# Altium PCB afeBoaard.PcbDoc
Units mm, origin at the board's own origin, x right, y up, seen from the top; angles counter-clockwise.
Board outline 85.22 x 87.63 mm, 2 copper layers (Top Layer, Bottom Layer), stack 1.17 mm thick; 34 components, 35 nets, 138 pads, 184 vias.
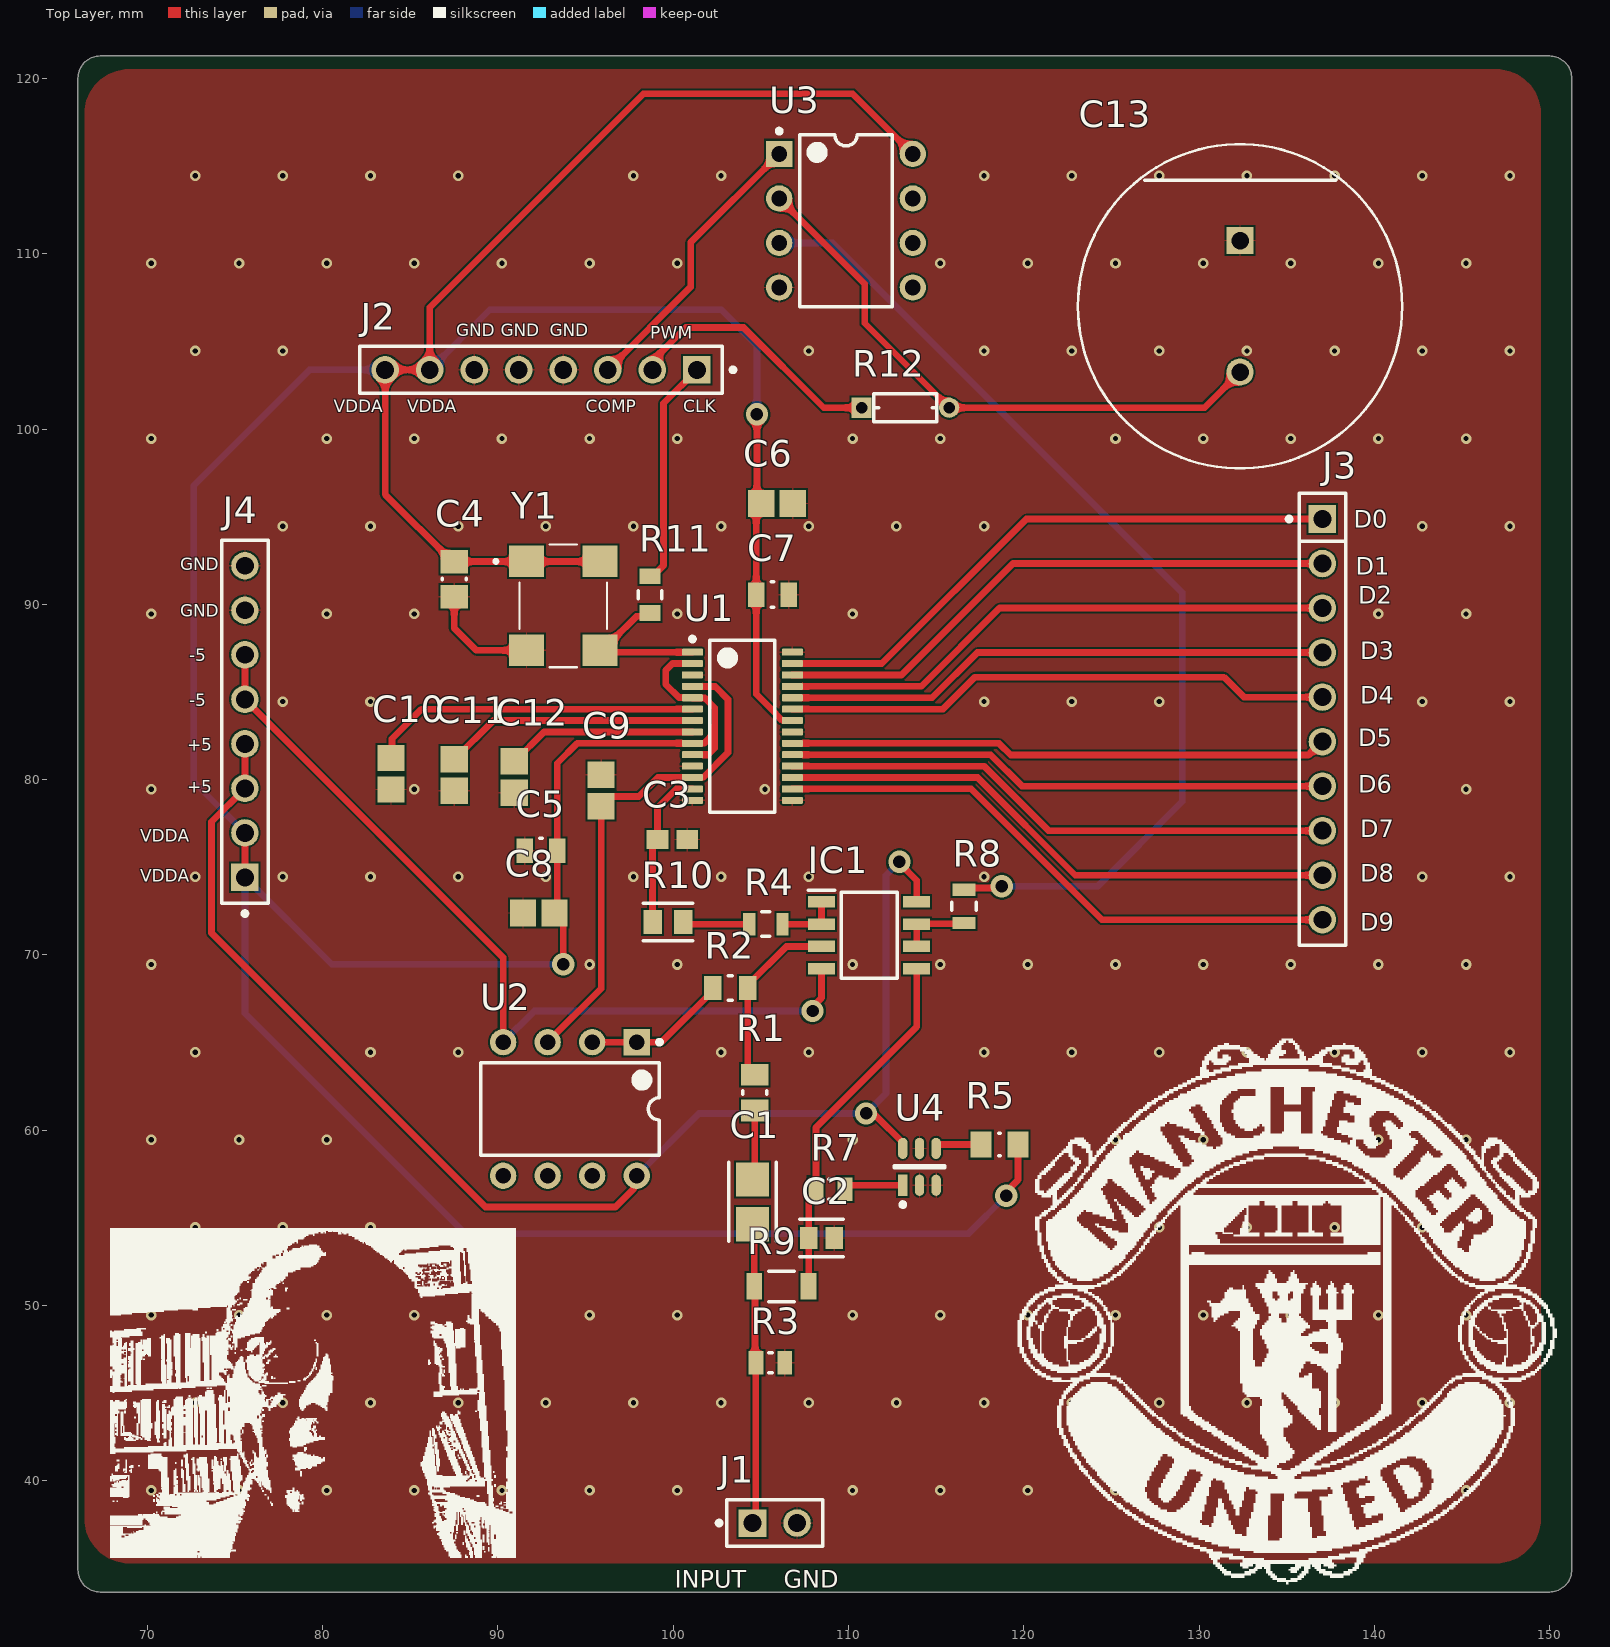
[diagram p0: Top Layer view]
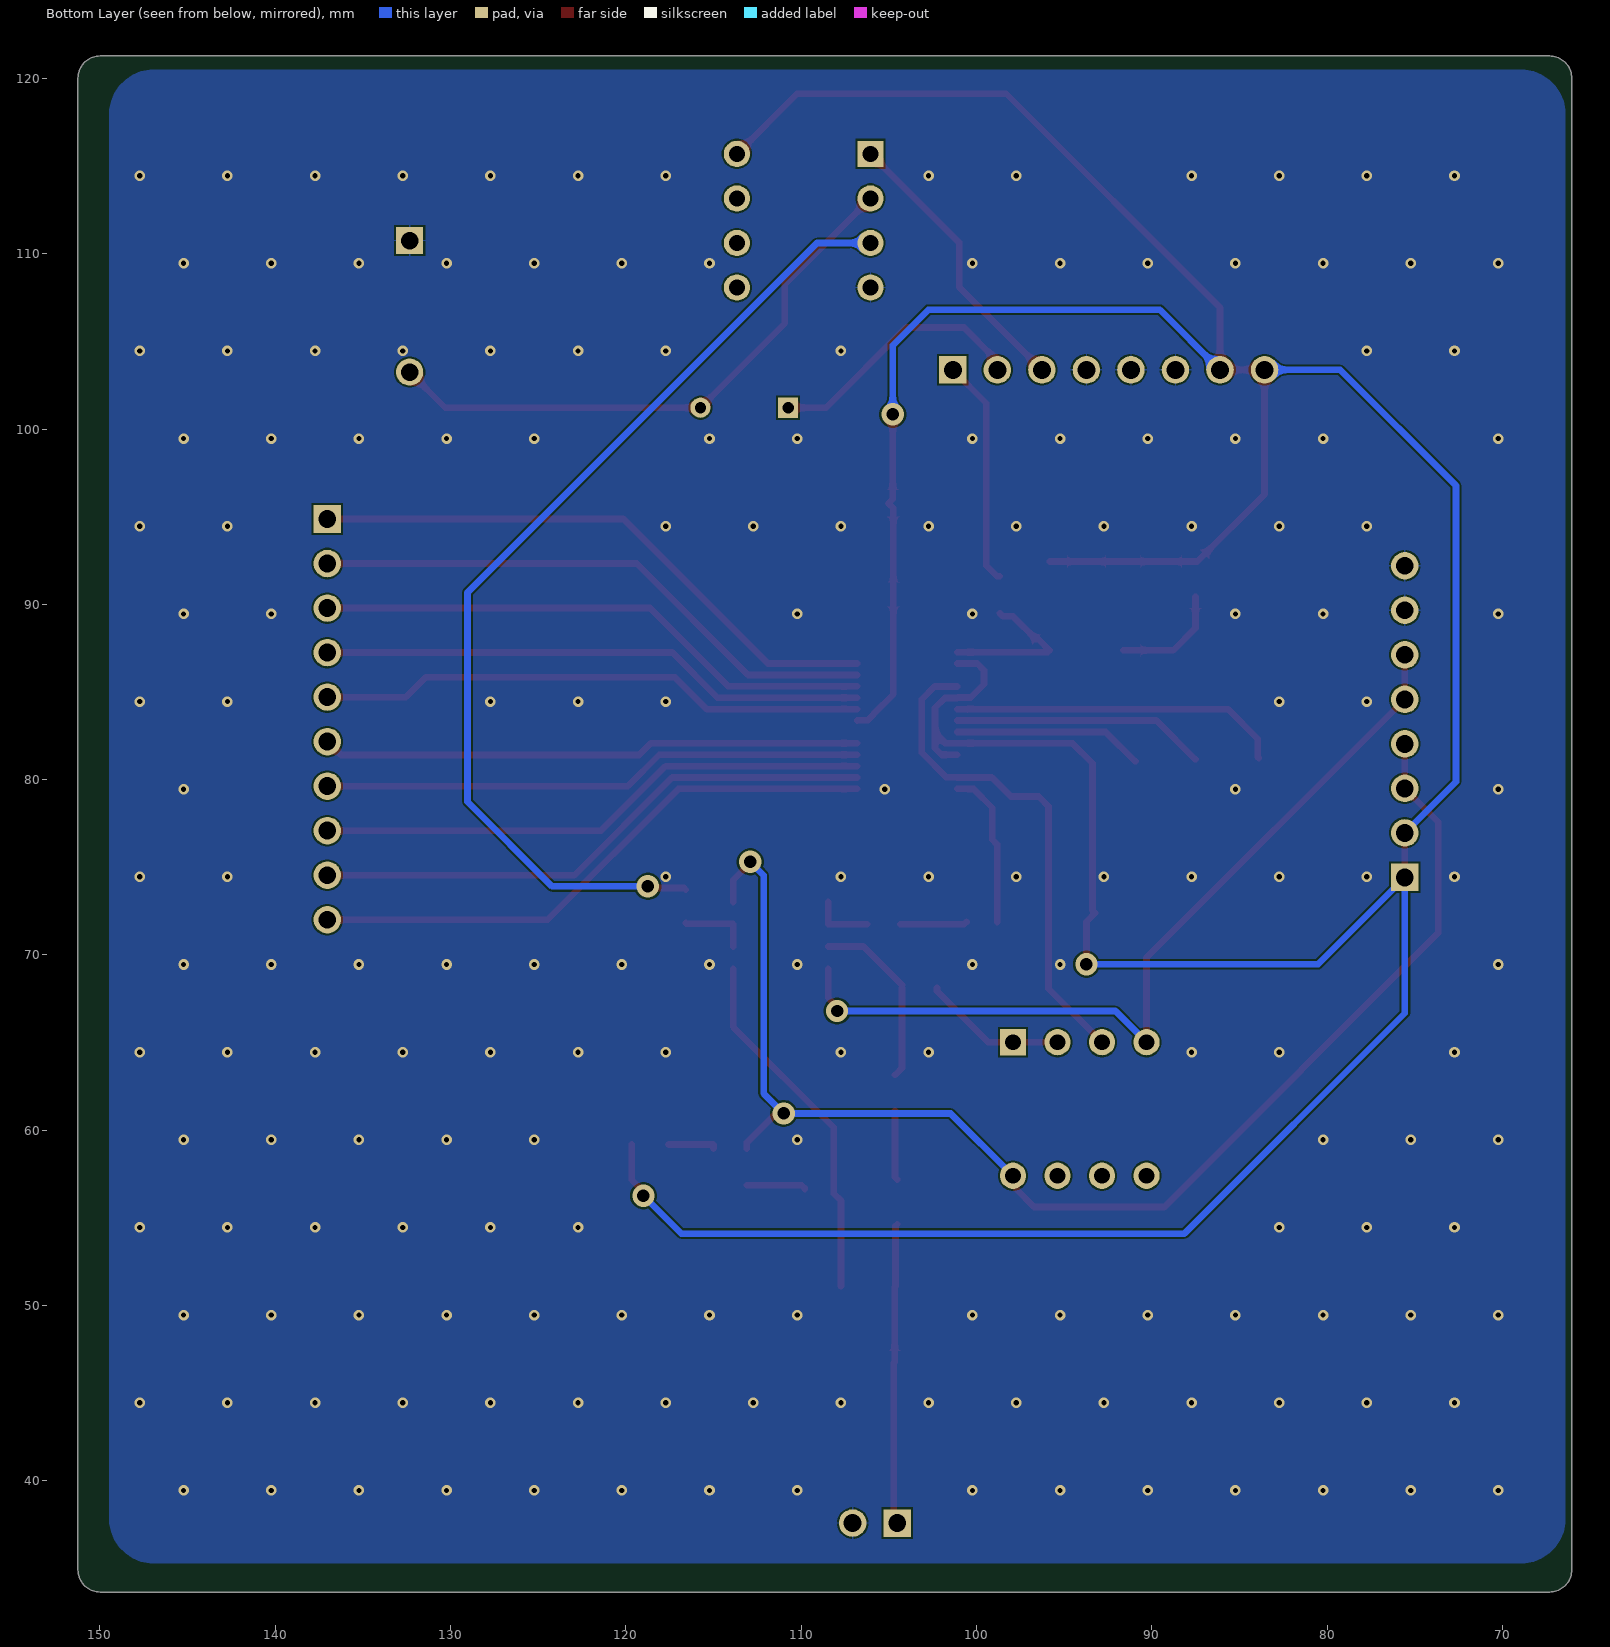
[diagram p1: Bottom Layer view, seen from below]
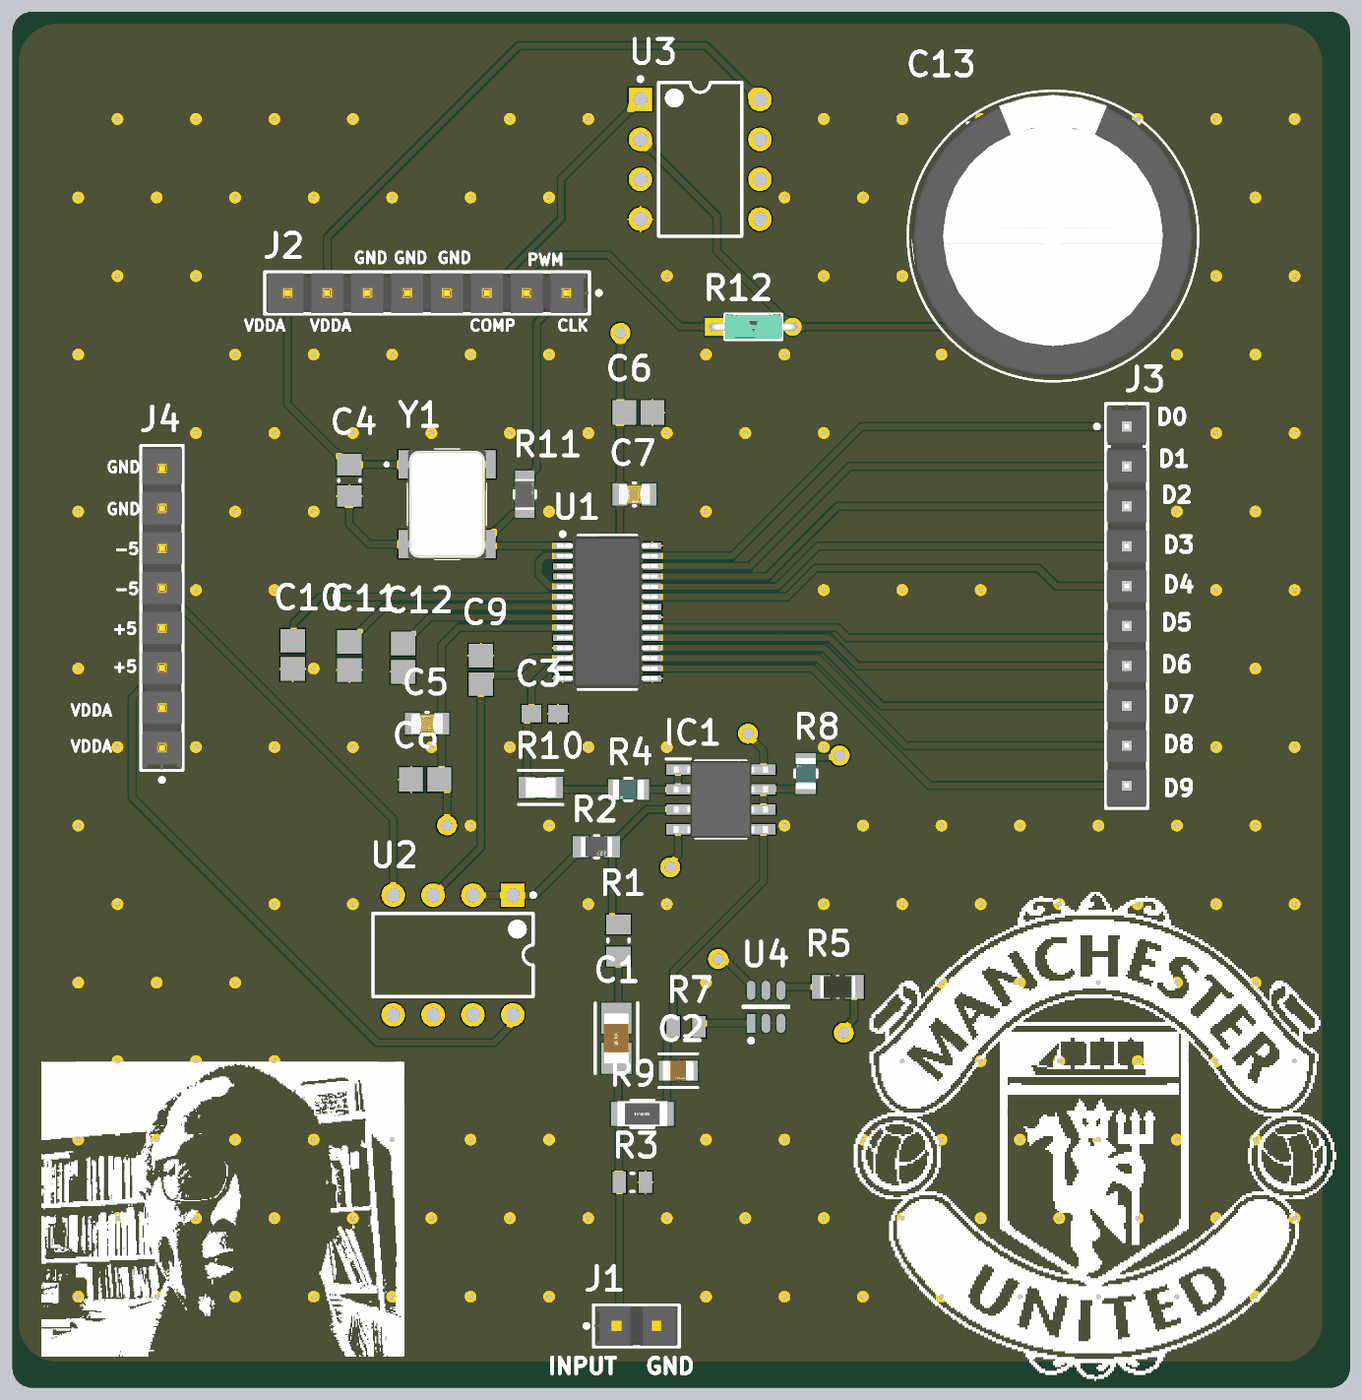
[diagram p2: 3D render of the assembled board from above, using the file's embedded part models]

## Layer stack, top to bottom
Top Solder: solder mask 0.0127, Solder Resist, Dk 3.8
Top Layer: signal copper 0.035
Dielectric: core 1.1, FR-4, Dk 4.5
Bottom Layer: signal copper 0.035
Bottom Solder: solder mask 0.0127, Solder Resist, Dk 3.8

## Board outline
66.04,34.925 66.04,120.015 cw(c67.31,120.015) 67.31,121.285 149.987,121.285 cw(c149.987,120.015) 151.257,120.015 151.257,34.925 cw(c149.987,34.925) 149.987,33.655 67.31,33.655 cw(c67.31,34.925)

## Design rules (kind name [scope] priority, off if disabled: settings)
BoardOutlineClearance [All] p1: gap=0.2 ignorepadtopadclearanceinfootprint=FALSE
Clearance [All] p1: gap=0.102 ignorepadtopadclearanceinfootprint=FALSE except(0.127: Arc-Via Track-Via SMDPad-Via THPad-Via Via-Via Via-Fill Via-Poly Via-Region Via-Text; 0.25: Arc-Hole Track-Hole SMDPad-Hole THPad-Hole Via-Hole Fill-Hole Poly-Hole Region-Hole Text-Hole)
ComponentClearance [All] p1: gap=0.102 collisioncheckmode=3 verticalgap=0.102 showdistances=TRUE
DiffPairsRouting [All] p1: maxlimit=0.102 minlimit=0.102 mostfreqgap=0.102 toplayer_minwidth=0.102 toplayer_maxwidth=1816.048 toplayer_prefwidth=0.102 bottomlayer_minwidth=0.102 bottomlayer_maxwidth=1816.048 bottomlayer_prefwidth=0.102 maxuncoupledlength=12.7
Height [All] p1: minheight=0 maxheight=1816.048 prefheight=12.7
HoleSize [All] p1: absolutevalues=TRUE maxlimit=6.3 minlimit=0.2 maxpercent=80.000 minpercent=20.000
HoleToHoleClearance [All] p1: gap=0.25 allowstackedmicrovias=FALSE
MinimumAnnularRing [All] p1: minimumring=0.076
MinimumSolderMaskSliver [All] p1: minsoldermaskwidth=0
PlaneClearance [All] p1: clearance=0.102
PlaneConnect PlaneConnectPowerPads [InPadClass('PowerPads')] p1: planeconnectstyle=Direct reliefexpansion=0.508 reliefentries=4 reliefconductorwidth=0.254 reliefairgap=0.254
PlaneConnect [All] p2: pad.planeconnectstyle=Relief pad.reliefexpansion=0.3 pad.reliefentries=4 pad.reliefconductorwidth=0.102 pad.reliefairgap=0.102 via.planeconnectstyle=Direct via.reliefexpansion=0.3 via.reliefentries=4 via.reliefconductorwidth=0.127 via.reliefairgap=0.127
PolygonConnect PolygonConnectPowerPads [All vs (InPadClass('PowerPads'))] p1: connectstyle=Direct reliefconductorwidth=0.254 reliefentries=4 polygonreliefangle="90 Angle" airgapwidth=0.254
PolygonConnect [All] p2: thpad.connectstyle=Relief thpad.reliefconductorwidth=0.102 thpad.reliefentries=4 thpad.polygonreliefangle="90 Angle" thpad.airgapwidth=0.102 smdpad.connectstyle=Relief smdpad.reliefconductorwidth=0.102 smdpad.reliefentries=4 smdpad.polygonreliefangle="90 Angle" smdpad.airgapwidth=0.102 via.connectstyle=Direct via.reliefconductorwidth=0.127 via.reliefentries=4 via.polygonreliefangle="90 Angle" via.airgapwidth=0.127
RoutingVias [All] p1: holewidth=0.2 width=0.45 viastyle="Through Hole" minholewidth=0.2 minwidth=0.45 maxholewidth=6.3 maxwidth=6.55
SilkToSilkClearance [All] p1: silktosilkclearance=0
SilkToSolderMaskClearance [IsPad] p1: minsilkscreentomaskgap=0.102 clearancetoexposedcopper=TRUE
SolderMaskExpansion [All] p1: expansion=0.075 istentingtop=FALSE
SupplyNets "Schematic Supply Nets_4" [InNet('VDDA')] p1: voltage=0.000
SupplyNets "Schematic Supply Nets_3" [InNet('GND')] p2: voltage=0.000
SupplyNets "Schematic Supply Nets_2" [InNet('1V')] p3: voltage=0.000
SupplyNets "Schematic Supply Nets_1" [InNet('-5')] p4: voltage=0.000
SupplyNets "Schematic Supply Nets" [InNet('+5')] p5: voltage=0.000
Width [All] p1: maxlimit=1816.048 minlimit=0.102 preferedwidth=0.102
20 further rules are at their usual default settings.

## Classes and differential pairs
net class D[9..0]: D0 D1 D2 D3 D4 D5 D6 D7 D8 D9
component class U_VoltageScaling: C1 C2 IC1 R1 R2 R3 R4 R5 R7 R8 R9 U4
component class U_DCCOMPProcess: C13 R12 U3
component class U_ADC: C3 C4 C5 C6 C7 C8 C9 C10 C11 C12 R10 R11 U1 U2 Y1
component class TopLevelProcessor400: J1 J2 J3 J4

## Components (designator, comment, footprint, x,y, rotation, side; value= is the part's Value field where it differs from the comment)
C1 "1206 33uF" FP-C3216-160-0_2-IPC_A 104.521,55.912 r90 top
C2 "0805 0.1uF" FP-0805B-IPC_C 108.458,53.848 r0 top
C3 "0603 50pF" CAPC1608X90X35ML15T15 99.949,76.581 r0 top
C4 "0805 10nF" CAPC0805(2012)100_M 87.503,91.44 r270 top value=10nF
C5 "0805 4.7uF" FP-CC0805-0_85-MFG 92.456,75.946 r180 top value="4.7 uF"
C6 "0805 100nF" CAPC2013X140X50ML20T25 105.918,95.758 r0 top
C7 "0805 4.7uF" FP-CC0805-0_85-MFG 105.664,90.551 r0 top value="4.7 uF"
C8 "0805 100nF" CAPC2013X140X50ML20T25 92.329,72.39 r180 top
C9 "0805 100nF" CAPC2013X140X50ML20T25 95.885,79.375 r90 top
C10 "0805 100nF" CAPC2013X140X50ML20T25 83.898,80.333 r270 top
C11 "0805 100nF" CAPC2013X140X50ML20T25 87.503,80.264 r270 top
C12 "0805 100nF" CAPC2013X140X50ML20T25 90.932,80.148 r270 top
C13 "EEUFK1V332S" FP-RAD-TH-D_18_0_5-L_25_2-MFG 132.334,107.001 r270 top
IC1 "LT1813CS8#PBF" SOIC127P599X175-8N 111.17,71.12 r0 top
J1 "TSW-102-07-F-S" FP-TSW-102-07-F-S-MFG 105.791,37.592 r0 top
J2 "TSW-108-08-G-S" FP-TSW-108-08-G-S-MFG 92.456,103.378 r180 top
J3 "TSW-110-07-T-S" FP-TSW-110-07-T-S-MFG 137.033,83.439 r270 top
J4 "TSW-108-08-G-S" FP-TSW-108-08-G-S-MFG 75.565,83.312 r90 top
R1 "0805 2k" RESC2013X60X30ML20T20 104.648,62.141 r90 top
R2 "0805 500 Ohm" FP-RNCF0805-MFG 103.251,68.11 r0 top
R3 "0805 1Mohm" RESC2013X50X30LL20T20 105.537,46.736 r0 top
R4 "0805 100" FP-TNPW0805-e3-MFG 105.283,71.755 r180 top
R5 "0805 10k" RESC2013X50X35ML15T15 118.618,59.182 r180 top value=10k
R7 "0805 100k" RESC2013X60X30LL20T20 108.966,56.642 r180 top
R8 "0805 100" FP-TNPW0805-e3-MFG 116.586,72.771 r90 top
R9 "1206 1.5Meg" FP-MCR18-MFG 106.172,51.092 r0 top
R10 "0805 18 Ohm" FP-CR0805-IPC_B 99.695,71.882 r180 top
R11 "0805 33 ohm" FP-AC0805-MFG 98.679,90.551 r90 top value=33Ω
R12 "MBA02040C2200FC100" FP-MBA0204-MFG 113.244,101.219 r0 top value=220Ω
U1 "ADC10065CIMT/NOPB" PW0028A_L 103.942,83.047 r0 top
U2 "TL052CPE4" TI-P8 94.107,61.214 r270 top
U3 "MCP6002-E/P" PDIP300-P8 109.855,111.887 r0 top
U4 "MCP1501T-10E/CHY" FP-C04-028-IPC_C 114.046,57.912 r90 top
Y1 "CB3LV-3I-60M000000" OSC_CB3LV-3I-60M000000 93.726,89.916 r0 top

## Footprints (in the part's own frame and the unit in brackets; to place one, negate y for a bottom-side part, rotate by r counter-clockwise, add the part's x,y. Pads: shape width x height; smd on the part's side, far side on the other; paste and mask are expansions set on the pad)
CAPC0805(2012)100_M [mm] "Chip Capacitor, Body 2.0x1.2mm, Height 1.0mm, IPC Low Density"
  rect 1.35x1.55 smd: 1(-1,0) 2(1,0)
  silkscreen extent -0.05,-0.67 0.05,0.67, body extent -1.1,-0.73 1.1,0.73, height 1
CAPC1608X90X35ML15T15 [mm] "Chip Capacitor, 2-Leads, Body 1.60x0.81mm, IPC Low Density"
  rect 1.25x1.1 smd: 1(-0.85,0) 2(0.85,0)
  body extent -0.88,-0.48 0.87,0.48, height 0.9
CAPC2013X140X50ML20T25 [mm] "Chip Capacitor, 2-Leads, Body 2.00x1.25mm, IPC Low Density"
  rect 1.5x1.55 smd: 1(-0.9,0) 2(0.9,0)
  body extent -1.1,-0.72 1.1,0.72, height 1.4
FP-0805B-IPC_C [mm]
  rect 1.006x1.262 smd paste+0 mask+0: 1(-0.726,0) 2(0.726,0)
  silkscreen extent -1.23,-1.07 1.23,1.07, body extent -1.33,-0.77 1.33,0.77, height 0.25
FP-AC0805-MFG [mm]
  rect 0.9x1.2 smd paste+0 mask+0: 1(-1.05,0) 2(1.05,0)
  silkscreen extent -0.23,-0.67 0.23,0.67, body extent -1.6,-0.77 1.6,0.77, height 0.25
FP-C04-028-IPC_C [mm]
  rect 1.205x0.538 smd paste+0 mask+0: 1(-1.05,0.95)
  rrect100% 1.205x0.538 smd paste+0 mask+0: 2(-1.05,0) 3(-1.05,-0.95) 4(1.05,-0.95) 5(1.05,0) 6(1.05,0.95)
  silkscreen extent -2.28,-1.45 0.05,1.45
FP-C3216-160-0_2-IPC_A [mm]
  rect 1.954x1.906 smd paste+0 mask+0: 1(-1.276,0) 2(1.276,0)
  silkscreen extent -2.25,-1.35 2.25,1.35, body extent -2.75,-1.45 2.75,1.45, height 0.25
FP-CC0805-0_85-MFG [mm]
  rect 0.95x1.4 smd paste+0 mask+0: 1(-0.925,0) 2(0.925,0)
  silkscreen extent -0.08,-0.72 0.08,0.72, body extent -1.6,-1.05 1.6,1.05, height 0.25
FP-CR0805-IPC_B [mm]
  rect 1.058x1.362 smd paste+0 mask+0: 1(-0.877,0) 2(0.877,0)
  silkscreen extent -1.41,-1.08 1.41,1.08, body extent -1.66,-0.93 1.66,0.93, height 0.25
FP-MBA0204-MFG [mm]
  rect 1.15x1.15 hole 0.65 paste-2539.97 mask+0: 1(-2.5,0)
  round 1.15 hole 0.65 paste-2539.97 mask+0: 2(2.5,0)
  silkscreen extent -1.8,-0.8 1.8,0.8, body extent -3.17,-0.9 3.17,0.9, height 0.25
FP-MCR18-MFG [mm]
  rect 0.9x1.5 smd paste+0 mask+0: 1(-1.55,0) 2(1.55,0)
  silkscreen extent -0.73,-0.87 0.73,0.87, body extent -2.1,-0.98 2.1,0.98, height 0.25
FP-RAD-TH-D_18_0_5-L_25_2-MFG [mm]
  rect 1.55x1.55 hole 1 paste-2539.97 mask+0: 1(-3.75,0)
  round 1.55 hole 1 paste-2539.97 mask+0: 2(3.75,0)
  silkscreen extent -9.25,-9.25 9.25,9.25, body extent -9.35,-9.35 9.35,9.35, height 0.25
FP-RNCF0805-MFG [mm]
  rect 1x1.35 smd paste+0 mask+0: 1(-1,0) 2(1,0)
  silkscreen extent -0.13,-0.7 0.13,0.7, body extent -1.6,-0.8 1.6,0.8, height 0.25
FP-TNPW0805-e3-MFG [mm]
  rect 0.7x1.3 smd paste+0 mask+0: 1(-0.95,0) 2(0.95,0)
  silkscreen extent -0.23,-0.7 0.23,0.7, body extent -1.4,-0.8 1.4,0.8, height 0.25
FP-TSW-102-07-F-S-MFG [mm]
  rect 1.57x1.57 hole 1.02 paste-2539.97 mask+0: 1(-1.27,0)
  round 1.57 hole 1.02 paste-2539.97 mask+0: 2(1.27,0)
  silkscreen extent -3.3,-1.33 2.73,1.34, body extent -2.83,-1.43 2.83,1.44, height 0.25
FP-TSW-108-08-G-S-MFG [mm]
  rect 1.57x1.57 hole 1.02 paste-2539.97 mask+0: 1(-8.89,0)
  round 1.57 hole 1.02 paste-2539.97 mask+0: 2(-6.35,0) 3(-3.81,0) 4(-1.27,0) 5(1.27,0) 6(3.81,0) 7(6.35,0) 8(8.89,0)
  silkscreen extent -11.08,-1.34 10.35,1.34, body extent -10.45,-1.44 10.45,1.44, height 0.25
FP-TSW-110-07-T-S-MFG [mm]
  rect 1.57x1.57 hole 1.02: 1(-11.43,0)
  round 1.57 hole 1.02: 2(-8.89,0) 3(-6.35,0) 4(-3.81,0) 5(-1.27,0) 6(1.27,0) 7(3.81,0) 8(6.35,0) 9(8.89,0) 10(11.43,0)
  silkscreen extent -12.89,-2.02 12.89,1.34, body extent -12.99,-1.44 12.99,1.44, height 0.25
OSC_CB3LV-3I-60M000000 [mm]
  rect 2x1.8 smd: 1(-2.1,2.54) 2(-2.1,-2.54) 3(2.1,-2.54) 4(2.1,2.54)
  silkscreen extent -3.95,-3.5 2.5,3.5, body extent -2.5,-3.5 2.5,3.5, height 1.8
PDIP300-P8 [mm] "8-Pin Plastic Dual In-Line Package (PDIP)"
  rect 1.5x1.5 hole 0.9: 1(-3.81,3.81)
  round 1.5 hole 0.9: 2(-3.81,1.27) 3(-3.81,-1.27) 4(-3.81,-3.81) 5(3.81,-3.81) 6(3.81,-1.27) 7(3.81,1.27) 8(3.81,3.81)
  silkscreen extent -3.93,-4.9 2.65,5.23, body extent -3.55,-4.9 3.55,4.9, height 4.32
PW0028A_L [mm] "SOP, 28-Leads, Body 9.8x4.5mm, Pitch 0.65mm, IPC High Density"
  rrect25% 1.2x0.4 smd: 1(-2.85,4.225) 2(-2.85,3.575) 3(-2.85,2.925) 4(-2.85,2.275) 5(-2.85,1.625) 6(-2.85,0.975) 7(-2.85,0.325) 8(-2.85,-0.325) 9(-2.85,-0.975) 10(-2.85,-1.625) 11(-2.85,-2.275) 12(-2.85,-2.925) 13(-2.85,-3.575) 14(-2.85,-4.225) 15(2.85,-4.225) 16(2.85,-3.575) 17(2.85,-2.925) 18(2.85,-2.275) 19(2.85,-1.625) 20(2.85,-0.975) 21(2.85,-0.325) 22(2.85,0.325) 23(2.85,0.975) 24(2.85,1.625) 25(2.85,2.275) 26(2.85,2.925) 27(2.85,3.575) 28(2.85,4.225)
  silkscreen extent -2.97,-4.9 1.85,5.1, body extent -3.21,-4.85 3.21,4.85, height 1
RESC2013X50X30LL20T20 [mm] "Chip Resistor, 2-Leads, Body 2.00x1.25mm, IPC High Density"
  rect 0.85x1.35 smd: 1(-0.825,0) 2(0.825,0)
  silkscreen extent -0.1,-0.58 0.1,0.58, body extent -1.1,-0.73 1.1,0.73, height 0.5
RESC2013X50X35ML15T15 [mm] "Chip Resistor, 2-Leads, Body 2.2x1.4mm, IPC Low Density"
  rect 1.2x1.5 smd: 1(-1.05,0) 2(1.05,0)
  silkscreen extent -0.05,-0.65 0.05,0.65, body extent -1.1,-0.7 1.1,0.7, height 0.5
RESC2013X60X30LL20T20 [mm] "Chip Resistor, 2-Leads, Body 2.00x1.25mm, IPC High Density"
  rect 0.85x1.35 smd: 1(-0.825,0) 2(0.825,0)
  silkscreen extent -0.1,-0.58 0.1,0.58, body extent -1.1,-0.73 1.1,0.73, height 0.6
RESC2013X60X30ML20T20 [mm] "Chip Resistor, 2-Leads, Body 2.00x1.25mm, IPC Low Density"
  rect 1.25x1.55 smd: 1(-1.025,0) 2(1.025,0)
  silkscreen extent -0.1,-0.67 0.1,0.67, body extent -1.1,-0.72 1.1,0.73, height 0.6
SOIC127P599X175-8N [mm]
  rect 1.526x0.65 smd: 1(-2.712,1.905) 2(-2.712,0.635) 3(-2.712,-0.635) 4(-2.712,-1.905) 5(2.712,-1.905) 6(2.712,-0.635) 7(2.712,0.635) 8(2.712,1.905)
  silkscreen extent -3.47,-2.45 1.6,2.58, body extent -3,-2.45 3,2.45, height 1.75
TI-P8 [mm] "DIP, 8-Leads, Body 9.59x6.35mm, Pitch 2.54mm"
  rect 1.5x1.5 hole 0.9: 1(-3.81,3.81)
  round 1.5 hole 0.9: 2(-3.81,1.27) 3(-3.81,-1.27) 4(-3.81,-3.81) 5(3.81,-3.81) 6(3.81,-1.27) 7(3.81,1.27) 8(3.81,3.81)
  silkscreen extent -3.93,-5.1 2.65,5.24, body extent -3.95,-5.07 3.95,5.07, height 5.08

## Part data
C1: library part CMP-08246-002728-1, "Multilayer Ceramic Capacitors 33uF ±20% 25V X5R SMD 1206  C3216X5R1E336M160AC", Capacitance=33uF, Case Code (Imperial)=1206, Case Code (Metric)=3216, Dielectric=X5R, Dielectric Material=Ceramic, Max Operating Temperature=85°C, Min Operating Temperature=-55°C, Package Quantity=1, Tolerance=20%, Voltage Rating=25V, Case/Package=1206, Depth=1.6mm, Lead Free="Lead Free", Length=3.2mm, Mount="Surface Mount", Packaging="Tape and Reel", REACH SVHC="No SVHC", Resistor Type=Ceramic, RoHS Compliant=Yes, Series=C, Termination=SMD/SMT, Thickness=1.6mm, Voltage Rating (DC)=25V, Weight=0.000571oz, Width=0.063inch
C2: library part CMP-45632-000003-1, "CAP CER 0.1UF 50V X7R 0805     0805B104K500CT", Capacitance=100nF, Case Code (Imperial)=0805, Case Code (Metric)=2012, Dielectric=X7R, Max Operating Temperature=125°C, Min Operating Temperature=-55°C, Tolerance=10%, Voltage=50V, Case/Package=0805, Depth=1.25mm, Lead Free="Lead Free", Length=2mm, Packaging="Tape and Reel", Radiation Hardening=No, RoHS Compliant=Yes, Voltage Rating=50V, Voltage Rating (DC)=50V
C3: library part CMP-2006-04331-1, "06035A500JAT2A", Manufacturer="AVX Interconnect / Elco", Part Number=06035A500JAT2A
C4: library part CMP-1036-03863-1, "CAP 10nF 200V ±20% 0805 (2012 Metric) Thickness 1mm SMD", Case-EIA=0805, Case-Metric=2012, Rated Voltage="200 V", Tolerance=Â±20%, Max Thickness="1 mm", Technology=SMT
C5 C7: library part CMP-03422-000207-1, "CAP CER 4.7UF 16V X7R 0805   CC0805KKX7R7BB475", Capacitance="4.7 uF", Manufacturer=Yageo, Manufacturer Part Number=CC0805KKX7R7BB475, Package=CC0805-0.85, Temperature="-30°C to +85°C", Temperature Characteristic=X7R, Temperature Range High=+85°C, Temperature Range Low=-30°C, Tolerance=0.1, Voltage Rating="16 V", Automotive=No, Category=Cap, ComponentLink2Description=Datasheet, ComponentLink2URL=http://www.yageo.com/documents/recent/UPY-GPHC_Y5V_6.3V-to-50V_8.pdf, Device Class L1="Passive Components", Device Class L2=Capacitors, Device Class L3="Ceramic Capacitors", Digikey Description="CAP CER 4.7UF 16V X7R 0805", Footprint Url=http://www.yageo.com/exep/pages/download/literatures/UPY-C_GEN_24.pdf, Height=0.95mm, Ipc Land Pattern Name=CAPC200125X85, Lead Free=Yes, Material=Ceramic, Mouser Description="Multilayer Ceramic Capacitors MLCC - SMD/SMT 4.7M pF 10% 16 Volts", Octopart=https://octopart.com/cc0805kkx7r7bb475-yageo-34429188, RoHS=TRUE
C6 C8 C9 C10 C11 C12: library part CMP-2007-04651-1, "0805DD104KAT2A", Manufacturer="AVX Interconnect / Elco", Part Number=0805DD104KAT2A
C13: library part CMP-05427-000163-1, "Aluminum Electrolytic Capacitors (Radial Lead Type) AEC-Q200 Qualified 3300uF ±20% 35V", Capacitance=3.3mF, Case/Package=Radial, Dielectric Material=Aluminium, Max Operating Temperature=105°C, Min Operating Temperature=-55°C, Package Quantity=50, Ripple Current=2.85A, Tolerance=20%, Voltage=35V, Construction=RADIAL, Diameter=18mm, Height=25mm, Lead Diameter=0.8mm, Lead Pitch=7.5mm, Length=25mm, Life (Hours)=5000Hour, Mount="Through Hole", Number of Pins=2, Packaging=Bulk, Radiation Hardening=No, REACH SVHC="No SVHC", RoHS Compliant=Yes, Series=FK, Termination=Radial, Voltage Rating=35V, Voltage Rating (DC)=35V
IC1: "Integrated Circuit", Manufacturer_Name="Analog Devices", Mouser Part Number=584-LT1813CS8#PBF, Arrow Part Number=LT1813CS8#PBF, Arrow Price/Stock=https://www.arrow.com/en/products/lt1813cs8pbf/analog-devices, Datasheet Link=https://www.analog.com/media/en/technical-documentation/data-sheets/18134fa.pdf, Height=1.752mm, Manufacturer_Part_Number=LT1813CS8#PBF, Mouser Price/Stock=https://www.mouser.co.uk/ProductDetail/Analog-Devices/LT1813CS8PBF?qs=ytflclh7QUVE2rX4b3OP3g%3D%3D
J1: library part CMP-02766-001458-1, "CONN HEADER VERT 2POS 2.54MM", Color=Black, Flammability Rating="UL94 V-0", Max Current Rating=7.6A, Max Operating Temperature=125°C, Max Voltage Rating (AC)=550V, Min Operating Temperature=-55°C, Package Quantity=1, Connector Type=Header, Contact Finish - Mating=GOLD, Contact Material=Bronze, Contact Mating Length=0.23inch, Contact Plating=Gold, Contact Shape=Square, Contact Type="Male Pin", Depth=2.54mm, Fastening Type=Pull, Gender=Male, Housing Color=Black, Housing Material=Polyester, Insulation Color=Black, Insulation Material=PBT, Length=5.08mm, Mount="Through Hole", Number of Contacts=2, Number of Positions=2, Number of Rows=1, Orientation=Straight, Packaging=Bulk, Pitch=2.54mm, Radiation Hardening=No, REACH SVHC="No SVHC", RoHS Compliant=Yes, Series=TSW, Termination=Solder
J2 J4: library part CMP-02766-000001-1, "CONN HEADER VERT 8POS 2.54MM", Manufacturer=Samtec, Temperature="-55°C to +125°C", Temperature Range High=+125°C, Temperature Range Low=-55°C, Automotive=No, Category=Conn, ComponentLink2Description=Datasheet, ComponentLink2URL=http://suddendocs.samtec.com/catalog_english/tsw_th.pdf, Conn Gender=Male, Conn Orientation=Straight, Contact Material=Gold,Nickel, Device Class L1=Connectors, Device Class L2="Headers and Wire Housings", Device Class L3=unset, Digikey Description="CONN HEADER VERT 8POS 2.54MM", Footprint Url=http://suddendocs.samtec.com/prints/tsw-xxx-xx-x-x-xx-xxx-footprint.pdf, Height=8.71mm, Lead Free=Yes, Manufacturer Part Number=TSW-108-08-G-S, Mouser Description="TSW - Samtec 2.54mm Pin Header 13.46mm Overall Pin Length 5.08mm Tail", Number of Contacts=8, Number of Rows=1, Octopart=https://octopart.com/tsw-108-08-g-s-samtec-272653, Package=TSW-108-08-G-S, Pitch=2.54mm, RoHS=TRUE
J3: library part CMP-00575-00272505-1, "TSW-110-07-T-S TSW - Samtec 2.54mm Pin Header 10.92mm Overall Pin Length (07) (mcv)(TO22)", Color=Black, Manufacturer Lifecycle Status=PRODUCTION, Max Current Rating=7.6A, Max Operating Temperature=105°C, Max Voltage Rating (AC)=550V, Min Operating Temperature=-55°C, Connector Type="Male Pin", Contact Material="Nickel, Tin", Contact Mating Length=5.842mm, Contact Plating=Tin, Depth=2.54mm, Gender=Male, Height=8.71mm, Housing Color=Black, Housing Material=Polyester, Lead Free="Lead Free", Lead Pitch=2.54mm, Length=25.4mm, Lifecycle Status=Production, Mount="Through Hole", Number of Contacts=10, Number of Pins=10, Number of Positions=10, Number of Rows=1, Orientation=Straight, Packaging=Bulk, Pitch=2.54mm, Radiation Hardening=No, REACH SVHC="No SVHC", RoHS=Compliant, Termination=Solder, Width=2.54mm
R1: library part CMP-2001-01798-1, "RK73B2ATTD202J", Manufacturer="KOA Speer", Part Number=RK73B2ATTD202J
R2: library part CMP-00347-25743669-1, "RNCF0805TKY500R RNCF Precision Thin Film Chip Resistor 0805 Size 500 Ohm 0.01% 0.125 W 5 ppm/°C 2-Pin SMD T/R", Case/Package=0805, Max Operating Temperature=155°C, Min Operating Temperature=-55°C, Power Rating=125mW, Resistance=500Ω, Temperature Coefficient=5ppm/°C, Tolerance=0.01%, Voltage Rating=150V, Composition="Thin Film", Height=650µm, Mount="Surface Mount", NexarPartId=25743669, RoHS=Non-Compliant
R3: library part CMP-2001-03632-1, "CRCW08051M00JNEA", Manufacturer="Vishay Dale", Part Number=CRCW08051M00JNEA
R4 R8: library part CMP-02407-011566-1, "RES 100 OHM 0.1% 1/8W 0805    TNPW0805100RBYEN", RoHS Compliant=Yes
R5: library part CMP-009-00018-5, "Chip Resistor, 10 KOhm, +/- 1%, 125 mW, -55 to 155 degC, 0805 (2012 Metric)", Case/Package=0805, Max Operating Temperature=155°C, Min Operating Temperature=-55°C, Power=125mW, Tolerance=1%, Voltage Rating=150V, Mounting Technology=SM, Pins=2, RoHS Compliant=True
R7: library part CMP-2001-02684-1, "100k 0805    SG73S2ATTD1003F", Manufacturer="KOA Speer", Part Number=SG73S2ATTD1003F
R9: library part CMP-08839-018795-1, "Thick Film Chip Resistor, 1206, 1.5MΩ, 5%, 200ppm/°C, 0.25W, 200V   MCR18FZHJ155", Resistance=1.5MR, Tolerance=5%, RoHS Compliant=Yes
R10: library part CMP-07231-001839-1, "Thick Film Chip Resistors 0805 18Ω 0.125W 5% 200ppm/°C  CR0805-JW-180ELF", Case Code (Imperial)=0805, Case Code (Metric)=2012, Max Operating Temperature=155°C, Max Power Dissipation=125mW, Min Operating Temperature=-55°C, Package Quantity=5000, Resistance=18R, Temperature Coefficient=200ppm/°C, Tolerance=5%, Voltage Rating=150V, Case/Package=0805, Composition="Thick Film", Contact Plating=Tin, Depth=1.25mm, Features="Moisture Resistant", Height=0.024inch, Length=2mm, Military Standard=Not, Mount="Surface Mount", Number of Terminations=2, Packaging="Tape and Reel", Power Rating=125mW, Radiation Hardening=No, Termination=SMD/SMT, Thickness=508um, Width=0.049inch
R11: library part CMP-03412-037241-1, "RES SMD 33 OHM 1% 1/8W 0805", Manufacturer=Yageo, Manufacturer Part Number=AC0805FR-0733RL, Package=AC0805, Power Rating=1/8W, Resistance=33Ω, Temperature="-55°C to +155°C", Temperature Range High=+155°C, Temperature Range Low=-55°C, Tolerance=0.01, Voltage Rating=150V, Automotive=Yes, Automotive Grade="Grade 0", Category=Res, ComponentLink2Description=Datasheet, ComponentLink2URL=http://www.yageo.com/documents/recent/PYu-AC_51_RoHS_L_6.pdf, Composition="Thick Film", Device Class L1="Passive Components", Device Class L2=Resistors, Device Class L3="Chip SMD Resistors", Digikey Description="RES SMD 33 OHM 1% 1/8W 0805", Footprint Url=http://www.yageo.com/exep/pages/download/literatures/PYu-R_Mount_10.pdf, Height=0.6mm, Ipc Land Pattern Name=RESC200125X50, Lead Free=Yes, Mouser Description="Thick Film Resistors - SMD 1/8W 33ohm 1% AEC-Q200", Octopart=https://octopart.com/ac0805fr-0733rl-yageo-46503501, RoHS=TRUE, Series=AC
R12: library part CMP-02408-000005-1, "RES 220 OHM 0.4W 1% AXIAL", Manufacturer="Vishay BC Components", Package=MBA0204, Power Rating=0.25W, Resistance=220Ω, Temperature="-55°C to +125°C", Temperature Coefficient=50ppm/°C, Temperature Range High=+125°C, Temperature Range Low=-55°C, Tolerance=1%, Voltage Rating=200V, Automotive=Yes, Automotive Grade="Grade 1", Category=Res, ComponentLink2Description=Datasheet, ComponentLink2URL=http://www.vishay.com/docs/28766/mbxsma.pdf, Composition="Metal Film", Device Class L1="Passive Components", Device Class L2=Resistors, Device Class L3="Through-Hole Resistors", Digikey Description="RES 220 OHM 0.4W 1% AXIAL", Height=1.6mm, Ipc Land Pattern Name=RESAD500W65L360D160, Lead Free=Yes, Manufacturer Part Number=MBA02040C2200FC100, Mouser Description="Thin Film Resistors - Through Hole .4watt 220ohms 1% 1/8watt body size", Octopart=https://octopart.com/mba02040c2200fc100-vishay-43743094, RoHS=TRUE, Series="MBA/SMA 0204"
U1: library part CMP-0054-00382-3, "10-Bit 65 MSPS 3V A/D Converter, 28-pin TSSOP, Pb-Free", Manufacturer="Texas Instruments", PackageTopMarking=NSUZXYTTE#*ADC10065*CIMT, PowerWise=Y, Code_JEDEC=MO-153-AE, ComponentLink1Description="Datasheet URL", ComponentLink1URL=http://www.ti.com/general/docs/lit/getliterature.tsp?genericPartNumber=ADC10065&fileType=pdf, CompType="ADC IC", PackageDescription="Molded TSSOP, Jedec, 9.7 x 4.4 x 0.9mm Body, 28 Lead, 0.65mm Pitch", PackageReference=PW0028A, PinCount=28, RoHS=Y
U2: library part CMP-0017-01039-1, "Dual Enhanced JFET Precision Operational Amplifier, 10 to 30 V, 0 to 70 degC, 8-pin DIP (P8), Pb-Free (RoHS)", Manufacturer="Texas Instruments", Rating=Military, Total Supply Voltage(Max)(+5V is 5, +/-5V is 10)=30, Total Supply Voltage(Min)(+5V is 5, +/-5V is 10)=10, CMRR(Min)(dB)=75, Code_JEDEC=MS-001, ComponentLink1Description="Manufacturer URL", ComponentLink1URL=http://www.ti.com/, ComponentLink2Description=Datasheet, ComponentLink2URL=http://www.ti.com/lit/ds/symlink/tl052.pdf, ComponentLink3Description="Package Specification", ComponentLink3URL=http://www.ti.com/litv/pdf/mpdi001b, DatasheetVersion=SLOS178A, Eco-Plan="Pb-Free (RoHS)", GBW(Typ)(MHz)=3, IIB(Max)(pA)=200, Iq per channel(Max)(mA)=2.8, Mounting Technology="Through Hole", Number of Channels=2, Offset Drift(Typ)(uV/C)=8, PackageDescription="8-Pin Plastic In-Line, Body 9.59 x 6.35 mm, Pitch 2.54 mm", PackageReference=P8, PackageVersion="4040082/E, 04/2010", PartNumber=TL052CPE4, Slew Rate(Typ)(V/us)=20.7, Sub Family="General Purpose Amplifier, High Supply Voltage Amplifier (>=30V)", Vio (25C)(Max)(mV)=1.5, Vn at 1kHz(Typ)(nV/rtHz)=19
U3: library part CMP-0187-00133-3, "None", Case/Package=PDIP, Input Bias Current=1pA, Input Offset Voltage (Vos)=4.5mV, Max Operating Temperature=125°C, Max Supply Voltage=6V, Min Operating Temperature=-40°C, Min Supply Voltage=1.8V, Nominal Supply Current=100uA, Operating Supply Voltage=5.5V, Output Current=23mA, Package Quantity=60, Power Supply Rejection Ratio (PSRR)=86dB, Voltage Gain=112dB, Amplifier Type="GENERAL PURPOSE", Bandwidth=1MHz, Common Mode Rejection Ratio=60dB, Gain Bandwidth Product=1MHz, Height=3.3mm, Input Offset Voltage-Max=4.5mV, Lead Free="Lead Free", Length=9.27mm, Mount="Through Hole", Number of Amplifiers=2, Number of Channels=2, Number of Circuits=2, Number of Elements=2, Number of Pins=8, Operating Supply Current=100uA, Output Current per Channel=23mA, Packaging=Rail/Tube, Radiation Hardening=No, REACH SVHC="No SVHC", RoHS Compliant=Yes, Slew Rate=0.6V/µs, Slew Rate-Nom=0.6V/µs, Supply Current=100uA, Technology=CMOS, Unity Gain Bandwidth Product=1MHz, Width=6.35mm
U4: library part CMP-06323-000005-1, "IC VREF SERIES 0.1% SOT23-6", Case/Package=SOT-23-6, Max Operating Temperature=125°C, Min Operating Temperature=-40°C, Min Output Voltage=1.024V, Operating Supply Current=550uA, Output Current=20mA, Temperature Coefficient=50ppm/°C, Tolerance=0.1%, Mount="Surface Mount", Output Type=Fixed, Packaging="Tape and Reel", Reference Type=Series, RoHS Compliant=Yes
Y1: library part CMP-011-000000-1, "60 MHz XO (Standard) HCMOS, TTL Oscillator 3.3V Enable/Disable 4-SMD, No Lead", Package="NON STANDARD-4 CTS", Check_prices=https://www.snapeda.com/parts/CB3LV-3I-60M000000/CTS-Frequency+Controls/view-part/?ref=eda, Component Type=Standard, Design Item ID=CB3LV-3I-60M000000, MF="CTS-Frequency Controls", MP=CB3LV-3I-60M000000, Pin Count=4, SnapEDA_Link=https://www.snapeda.com/parts/CB3LV-3I-60M000000/CTS-Frequency+Controls/view-part/?ref=snap, Source=CB3LV-3I-60M000000.SchLib

## Via types
v1: diameter 0.6, hole 0.3, Top Layer to Bottom Layer, 177 vias
v2: diameter 1.27, hole 0.711, Top Layer to Bottom Layer, 7 vias

## Nets (pads, with @x,y where several pads share a name; then routed paths per layer and width w, separated by ;. In a path a pad name is that pad's centre, name@x,y a point inside that pad or via, vN(x,y) a via of type N, cw(c..) or ccw(c..) an arc to the next point about the centre after c; other vN are vias at no path point)
1V: R7.1 U4.1 | length 3.4
  Top Layer w0.381: R7.1 109.791,56.687 109.966,56.862 U4.1
+5: IC1.8 J4.3 J4.4 U2.8 U4.6 | length 78.9
  Top Layer w0.381: J4.4 J4.3 73.66,77.597 73.66,71.247 89.281,55.626 96.707,55.626 97.732,56.651 97.732,57.219 U2.8 ; v2(110.998,60.96) 111.139,60.819 111.573,60.819 113.096,59.296 U4.6 ; v2(112.903,75.311) 112.903,75.239 113.882,74.26 IC1.8
  Bottom Layer w0.381: U2.8 101.473,60.96 v2(110.998,60.96) 112.141,62.103 112.141,74.549 v2(112.903,75.311)
-5: IC1.4 J4.5 J4.6 U2.4 | length 49.2
  Top Layer w0.381: J4.6 J4.5 90.297,69.85 U2.4 ; v2(107.95,66.802) 107.95,67.043 108.458,67.551 IC1.4
  Bottom Layer w0.381: U2.4 92.075,66.802 v2(107.95,66.802)
CLK: R11.1 U1.1 Y1.3 | length 9
  Top Layer w0.381: R11.1 98.496,89.318 97.908,89.318 96.599,88.009 96.459,88.009 Y1.3 95.93,87.272 U1.1
CLK_OUT: J2.1 R11.2 | length 13
  Top Layer w0.381: R11.2 98.829,91.601 99.441,92.213 99.441,101.473 J2.1
COMP_OUT: J2.3 U3.1 | length 16.4
  Top Layer w0.381: J2.3 100.99,108.102 100.99,110.642 U3.1
D0: J3.1 U1.27 | length 33.9
  Top Layer w0.381: U1.27 111.895,86.622 120.142,94.869 J3.1@137.287,94.869
D1: J3.2 U1.26 | length 33.1
  Top Layer w0.381: U1.26 113.023,85.972 119.38,92.329 J3.2@137.287,92.329
D2: J3.3 U1.25 | length 32.3
  Top Layer w0.381: U1.25 114.151,85.322 118.618,89.789 J3.3@137.287,89.789
D3: J3.4 U1.24 | length 31.6
  Top Layer w0.381: U1.24 114.771,84.672 117.348,87.249 J3.4@137.287,87.249
D4: J3.5 U1.23 | length 31.7
  Top Layer w0.381: U1.23 115.391,84.022 117.217,85.848 131.41,85.848 132.549,84.709 J3.5@137.287,84.709
D5: J3.6 U1.20 | length 31.1
  Top Layer w0.381: U1.20 118.588,82.072 119.253,81.407 136.235,81.407 136.997,82.169 J3.6@137.287,82.169
D6: J3.7 U1.19 | length 31.2
  Top Layer w0.381: U1.19 118.095,81.422 119.888,79.629 J3.7@137.287,79.629
D7: J3.8 U1.18 | length 32
  Top Layer w0.381: U1.18 117.729,80.772 121.412,77.089 J3.8@137.287,77.089
D8: J3.9 U1.17 | length 32.8
  Top Layer w0.381: U1.17 117.363,80.122 122.936,74.549 J3.9@137.287,74.549
D9: J3.10 U1.16 | length 33.6
  Top Layer w0.381: U1.16 116.997,79.472 124.46,72.009 J3.10@137.287,72.009
DC_IN: R8.2 U3.3 | length 57.7
  Top Layer w0.381: R8.2 116.682,73.818 118.649,73.818 v2(118.745,73.914)
  Bottom Layer w0.381: U3.3 109.093,110.617 129.032,90.678 129.032,78.74 124.206,73.914 v2(118.745,73.914)
GND: C2.2 C3.2 C4.2 C5.2 C6.2 C7.2 C8.2 C9.2 C10.2 C11.2 C12.2 C13.1 J1.2 J2.4 J2.5 J2.6 J4.7 J4.8 R3.2 U1.3 U1.11 U1.14 U1.15 U1.21 U1.28 U3.4 U4.2 U4.3 U4.5 Y1.2 | length 6.4
  Top Layer w0.381: C4.2 87.503,88.646 88.773,87.376 Y1.2
  other v1: 70.229,39.455 75.229,39.455 80.229,39.455 85.229,39.455 90.229,39.455 95.229,39.455 100.229,39.455 110.229,39.455 115.229,39.455 120.229,39.455 125.229,39.455 130.229,39.455 135.229,39.455 140.229,39.455 145.229,39.455 72.729,44.455 77.729,44.455 82.729,44.455 87.729,44.455 92.729,44.455 97.729,44.455 102.729,44.455 107.729,44.455 112.729,44.455 117.729,44.455 122.729,44.455 127.729,44.455 132.729,44.455 137.729,44.455 142.729,44.455 147.729,44.455 70.229,49.455 75.229,49.455 80.229,49.455 85.229,49.455 90.229,49.455 95.229,49.455 100.229,49.455 110.229,49.455 115.229,49.455 120.229,49.455 125.229,49.455 130.229,49.455 135.229,49.455 140.229,49.455 145.229,49.455 72.729,54.455 77.729,54.455 82.729,54.455 122.729,54.455 127.729,54.455 132.729,54.455 137.729,54.455 142.729,54.455 147.729,54.455 70.229,59.455 75.229,59.455 80.229,59.455 110.229,59.455 125.229,59.455 130.229,59.455 135.229,59.455 140.229,59.455 145.229,59.455 72.729,64.455 82.729,64.455 87.729,64.455 102.729,64.455 107.729,64.455 117.729,64.455 122.729,64.455 127.729,64.455 132.729,64.455 137.729,64.455 142.729,64.455 147.729,64.455 70.229,69.455 95.229,69.455 100.229,69.455 110.229,69.455 115.229,69.455 120.229,69.455 125.229,69.455 130.229,69.455 135.229,69.455 140.229,69.455 145.229,69.455 72.729,74.455 77.729,74.455 82.729,74.455 87.729,74.455 92.729,74.455 97.729,74.455 102.729,74.455 107.729,74.455 117.729,74.455 142.729,74.455 147.729,74.455 70.229,79.455 85.229,79.455 105.229,79.455 145.229,79.455 77.729,84.455 82.729,84.455 117.729,84.455 122.729,84.455 127.729,84.455 142.729,84.455 147.729,84.455 70.229,89.455 80.229,89.455 85.229,89.455 100.229,89.455 110.229,89.455 140.229,89.455 145.229,89.455 77.729,94.455 82.729,94.455 87.729,94.455 92.729,94.455 97.729,94.455 102.729,94.455 107.729,94.455 112.729,94.455 117.729,94.455 142.729,94.455 147.729,94.455 70.229,99.455 80.229,99.455 85.229,99.455 90.229,99.455 95.229,99.455 100.229,99.455 110.229,99.455 115.229,99.455 125.229,99.455 130.229,99.455 135.229,99.455 140.229,99.455 145.229,99.455 72.729,104.455 77.729,104.455 107.729,104.455 117.729,104.455 122.729,104.455 127.729,104.455 132.729,104.455 137.729,104.455 142.729,104.455 147.729,104.455 70.229,109.455 75.229,109.455 80.229,109.455 85.229,109.455 90.229,109.455 95.229,109.455 100.229,109.455 115.229,109.455 120.229,109.455 125.229,109.455 130.229,109.455 135.229,109.455 140.229,109.455 145.229,109.455 72.729,114.455 77.729,114.455 82.729,114.455 87.729,114.455 97.729,114.455 102.729,114.455 117.729,114.455 122.729,114.455 127.729,114.455 132.729,114.455 137.729,114.455 142.729,114.455 147.729,114.455
IN_AC: IC1.3 R1.2 R2.2 | length 10.2
  Top Layer w0.381: R2.2 104.251,63.541 104.626,63.166 R1.2 ; R2.2@104.251,68.285 106.451,70.485 IC1.3
IN_DC: C2.1 IC1.5 R7.2 R9.2 | length 20.5
  Top Layer w0.381: R9.2 107.727,51.097 107.727,53.843 C2.1 ; C2.1@107.732,53.976 107.732,55.983 108.141,56.392 108.141,60.154 113.882,65.895 IC1.5
INPUT: C1.1 J1.1 R3.1 R9.1 | length 17.2
  Top Layer w0.381: J1.1 104.712,37.783 R3.1 104.667,46.781 104.667,51.047 R9.1 104.622,54.535 C1.1
NetC1_2: C1.2 R1.1 | length 4
  Top Layer w0.381: C1.2 104.648,57.315 R1.1
NetC13_2: C13.2 R12.2 U3.2 | length 33.4
  Top Layer w0.381: U3.2 110.928,108.274 110.928,106.035 R12.2 130.302,101.219 C13.2
NetR4_2: R4.2 R10.1 | length 3.8
  Top Layer w0.381: R10.1 100.699,71.755 R4.2
NetR5_2: R5.2 U4.4 | length 2.8
  Top Layer w0.381: U4.4 114.996,59.164 115.014,59.182 R5.2
OUT_AC: IC1.1 IC1.2 R4.1 | length 3.5
  Top Layer w0.381: R4.1 IC1.2 IC1.1
OUT_DC: IC1.6 IC1.7 R8.1 | length 4
  Top Layer w0.381: IC1.6 IC1.7 113.915,71.788 116.553,71.788 R8.1
PWM_IN: J2.2 R12.1 | length 15.1
  Top Layer w0.381: J2.2 99.011,103.583 99.011,104.091 100.711,105.791 104.013,105.791 108.585,101.219 R12.1
VCOM: C9.1 U1.4 U1.12 U2.3 | length 28.6
  Top Layer w0.381: U2.3 95.885,68.072 C9.1 96.445,79.035 98.032,79.035 99.12,80.122 U1.12 101.101,80.131 101.714,80.131 103.124,81.541 103.124,84.582 102.394,85.312 101.101,85.312 U1.4
VDDA: C4.1 C5.1 C6.1 C7.1 C8.1 J2.7 J2.8 J4.1 J4.2 R5.1 U1.2 U1.5 U1.9 U1.10 U1.22 U3.8 Y1.1 Y1.4 | length 253.7
  Top Layer w0.381: J4.1 J4.2 ; v2(93.726,69.469) 93.726,71.893 C8.1 93.381,72.542 C5.1 93.381,80.935 94.518,82.072 U1.9 101.101,82.081 101.766,82.081 102.362,82.677 ; Y1.4 95.81,92.44 C4.1 87.403,92.44 83.566,96.277 J2.8 J2.7 86.106,106.934 98.298,119.126 110.236,119.126 U3.8 ; U1.10 101.996,81.422 102.362,81.788 102.362,82.677 ; U1.2 99.957,86.622 99.568,86.233 99.568,85.44 100.327,84.681 101.083,84.681 101.101,84.663 101.804,84.663 102.362,84.105 102.362,82.677 ; v2(104.775,100.838) 104.775,96.001 C6.1 104.739,95.479 C7.1 104.739,84.872 105.874,83.737 105.874,83.72 106.213,83.381 106.782,83.381 U1.22 ; v2(118.999,56.261) 118.999,56.502 119.668,57.171 R5.1
  Bottom Layer w0.381: J4.2 72.644,79.883 72.644,96.774 79.248,103.378 J2.8 ; J2.7 89.535,106.807 102.743,106.807 104.775,104.775 v2(104.775,100.838) ; v2(93.726,69.469) 80.518,69.469 J4.1 75.565,66.675 88.138,54.102 116.84,54.102 v2(118.999,56.261)
Vfollow: R2.1 U2.1 U2.2 | length 8.3
  Top Layer w0.381: U2.2 U2.1 99.34,65.024 102.251,67.935 R2.1
Vin+: C3.1 R10.2 U1.13 | length 9.1
  Top Layer w0.381: R10.2 98.818,76.3 C3.1 99.099,78.398 100.173,79.472 U1.13
VREF6: C10.1 U1.6 | length 19
  Top Layer w0.381: C10.1 83.957,81.292 83.957,82.331 85.648,84.022 U1.6
VREF7: C11.1 U1.7 | length 14.5
  Top Layer w0.381: C11.1 87.528,81.164 89.736,83.372 U1.7
VREF8: C12.1 U1.8 | length 10.9
  Top Layer w0.381: C12.1 90.957,81.048 92.631,82.722 U1.8
pads on no net: U2.5 U2.6 U2.7 U3.5 U3.6 U3.7

## Polygon pours and split planes (outlines as drawn)
GND on Top Layer "GND_L01_P001" (solid, remove dead copper, pour order 1): 66.421,37.846 ccw(c68.961,37.846) 68.961,35.306 146.939,35.306 ccw(c146.939,37.846) 149.479,37.846 149.479,117.983 ccw(c146.939,117.983) 146.939,120.523 68.961,120.523 ccw(c68.961,117.983) 66.421,117.983
GND on Bottom Layer "3" (solid, pour order 0): 66.403,37.828 ccw(c68.943,37.828) 68.943,35.288 146.921,35.288 ccw(c146.921,37.828) 149.461,37.828 149.461,117.965 ccw(c146.921,117.965) 146.921,120.505 68.943,120.505 ccw(c68.943,117.965) 66.403,117.965

## Silkscreen, mask and mechanical layers (free items; w line width, h text height)
Top Overlay:
  drawing of 154 lines, arcs and shapes, not listed
  text "GND" at 87.63,105.283 h0.7
  text "GND" at 90.17,105.283 h0.7
  text "GND" at 92.964,105.283 h0.7
  text "PWM" at 98.679,105.156 h0.7
  text "VDDA" at 80.645,100.965 h0.7
  text "VDDA" at 84.836,100.965 h0.7
  text "COMP" at 94.996,100.965 h0.7
  text "CLK" at 100.584,100.965 h0.7
  text "D0" at 138.811,94.361 h1
  text "GND" at 71.882,91.948 h0.7
  text "D1" at 138.938,91.694 h1
  text "D2" at 139.065,90.043 h1
  text "GND" at 71.882,89.281 h0.7
  text "D3" at 139.192,86.868 h1
  text "-5" at 72.39,86.741 h0.7
  text "D4" at 139.192,84.328 h1
  text "-5" at 72.39,84.201 h0.7
  text "D5" at 139.065,81.915 h1
  text "+5" at 72.263,81.661 h0.7
  text "+5" at 72.263,79.248 h0.7
  text "D6" at 139.065,79.248 h1
  text "D7" at 139.192,76.708 h1
  text "VDDA" at 69.596,76.454 h0.7
  text "VDDA" at 69.596,74.168 h0.7
  text "D8" at 139.192,74.168 h1
  text "D9" at 139.192,71.374 h1
  text "INPUT" at 100.076,33.909 h1
  text "GND" at 106.299,33.909 h1